# EAGLE board v5 (EAGLE 9.5.2), part 1 of 2
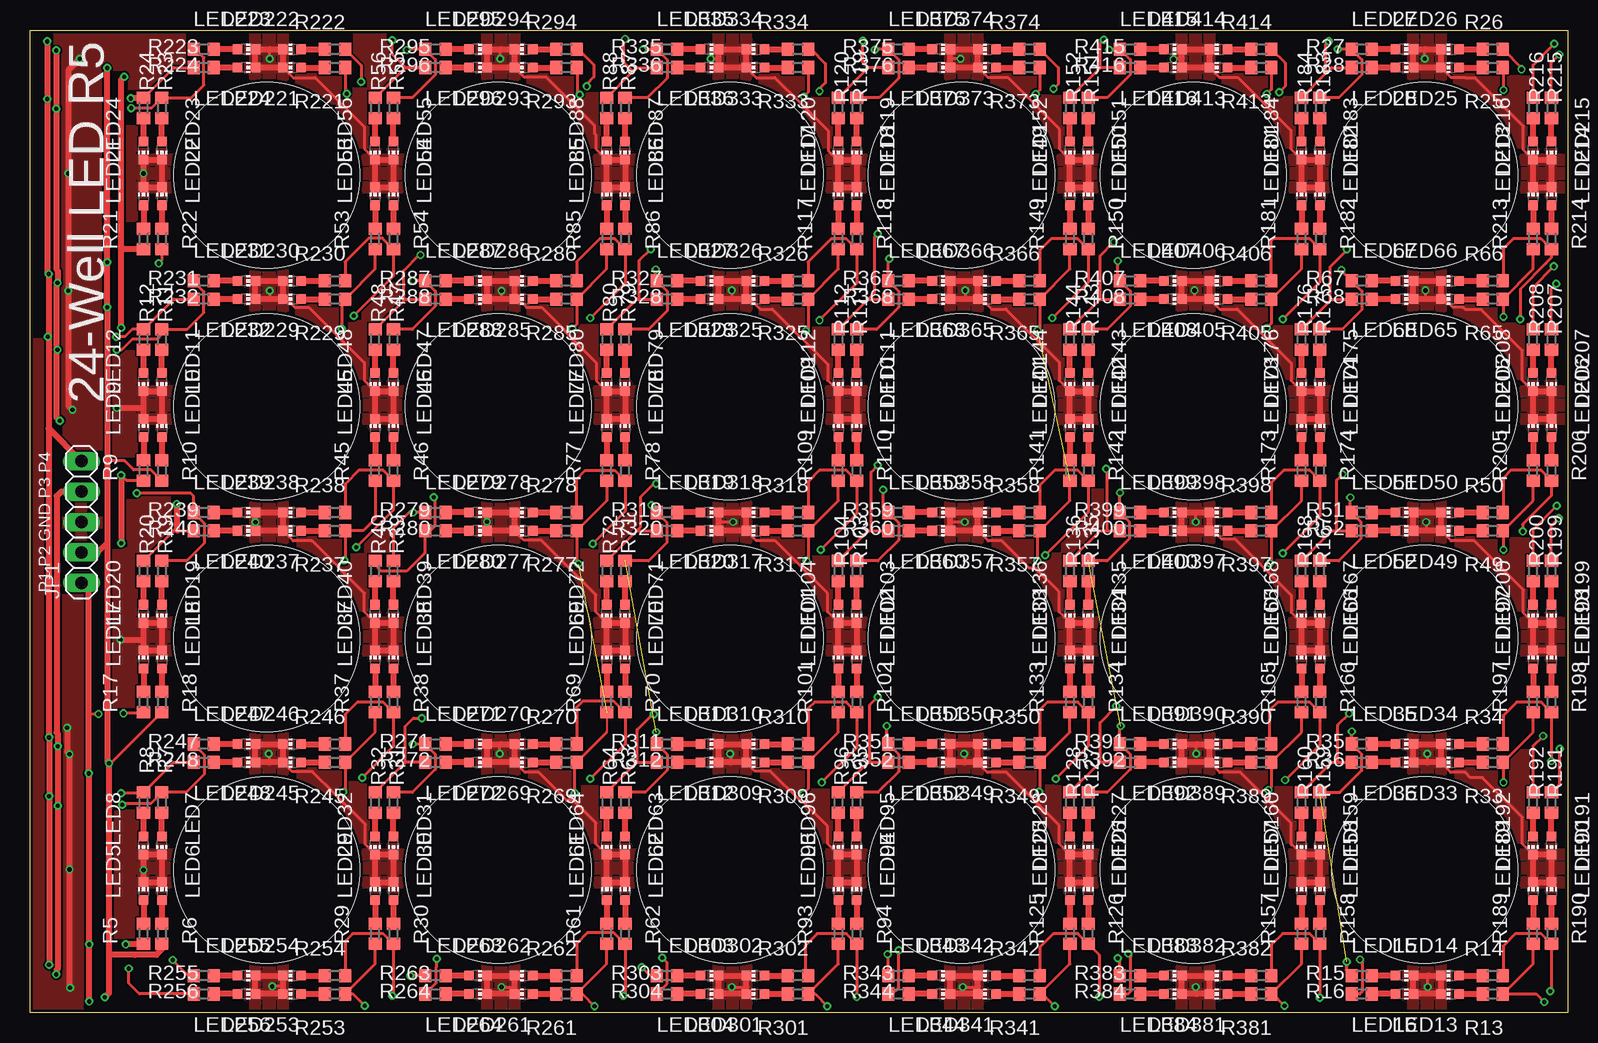
[diagram p0: board, top side]
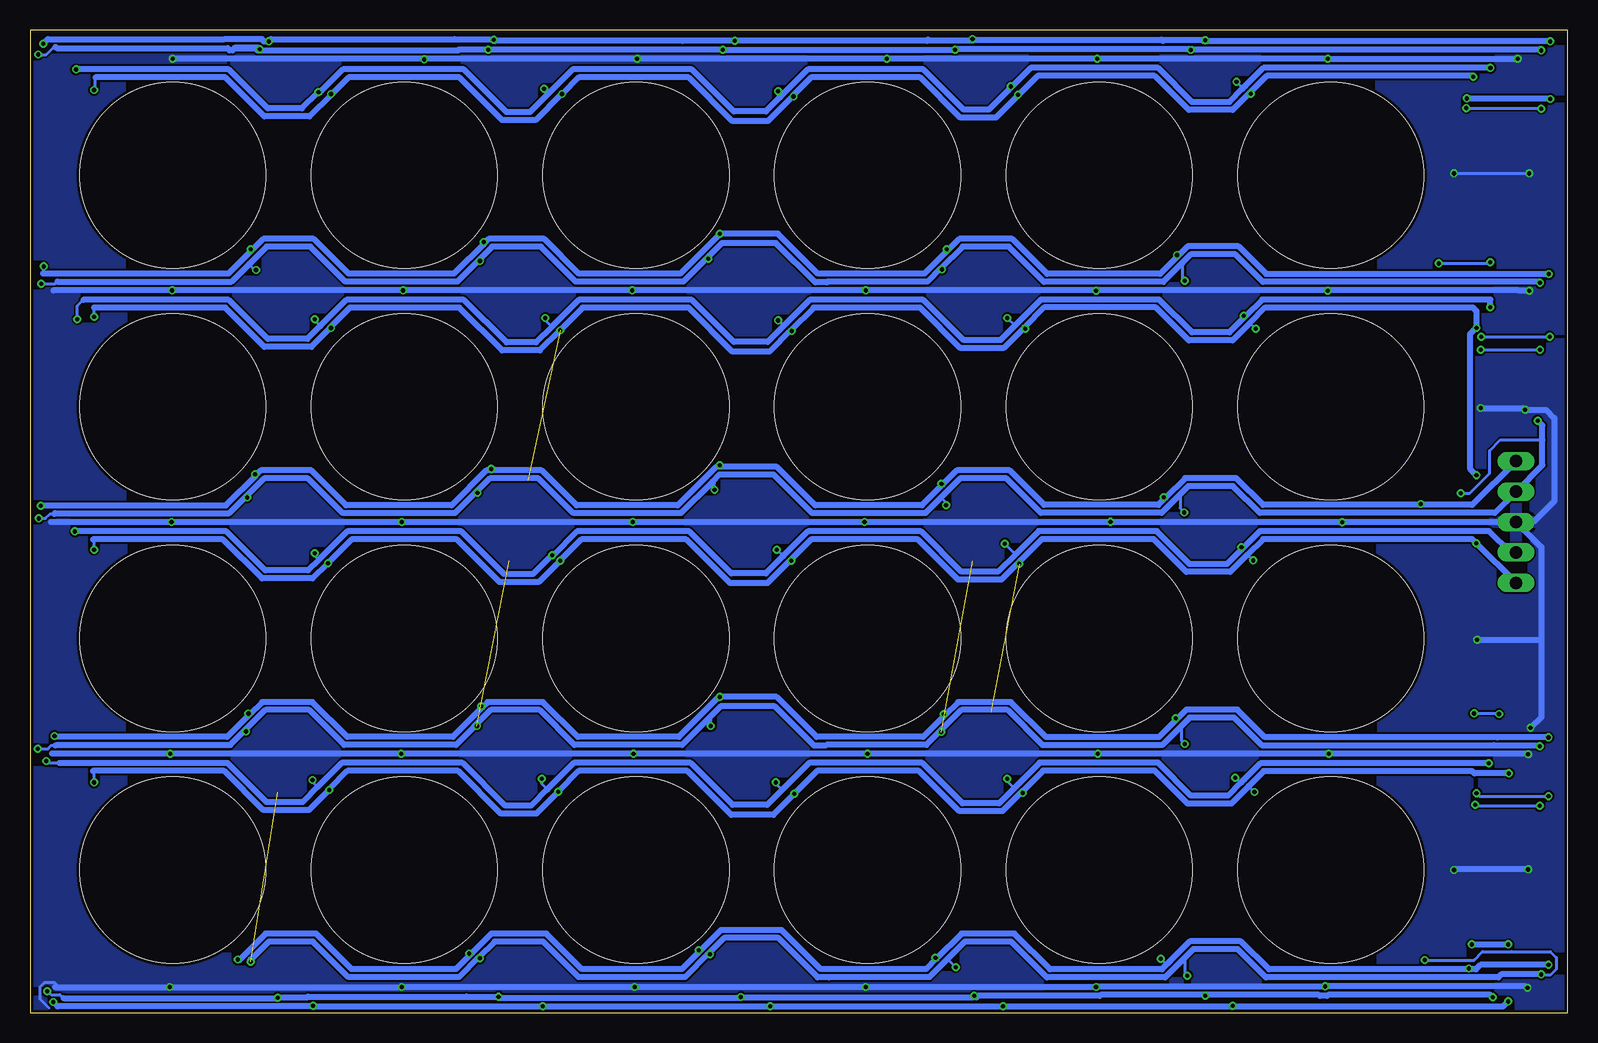
[diagram p1: board, bottom side, seen from below]

Size 128.13 x 81.9 mm. Coordinates in mm from the lower left corner, seen from the top.
Outline: 0,0 0,81.9 128.13,81.9 128.13,0 0,0
Copper layers (1*16): Top 0.035mm / dielectric 1.5mm / Bottom 0.035mm
Design rules "default *": minimum track width 7mil, minimum drill 0.35mm, track to track 6mil, track to pad 6mil, pad to pad 6mil, via to via 6mil, smd to smd 6mil, copper to edge 10mil, drill to drill 6mil, minimum pad ring 10mil, minimum via ring 6mil, stop-mask expansion 4mil, vias tented up to drill 0mil, thermal gap 10mil
Holes 15.5 mm at 19.73,31.2 19.73,50.5 19.73,69.8 39.03,31.2 39.03,50.5 39.03,69.8 58.33,31.2 58.33,50.5 58.33,69.8 77.63,31.2 77.63,50.5 77.63,69.8 96.93,31.2 96.93,50.5 96.93,69.8 116.23,69.8 116.23,50.5 116.23,31.2 19.73,11.9 39.03,11.9 58.33,11.9 77.63,11.9 96.93,11.9 116.23,11.9

## Footprints (pad centres in the part's own frame; a part is rotated, then mirrored left to right if it is on the bottom)
1X05 = drill 1.016 long: 1 -5.08,0; 2 -2.54,0; 3 0,0; 4 2.54,0; 5 5.08,0
CHIP-LED0603 = smd 0.8 x 0.8: A 0,-0.75; C 0,0.75
R0603 = smd 1 x 1.1: 1 -0.85,0; 2 0.85,0

## Placement (x,y rotation side)
JP1  [1X05]  4.29,40.9 90 top
LED5  [CHIP-LED0603]  9.46,10.15 0 top
LED6  [CHIP-LED0603]  10.99,10.15 0 top
LED7  [CHIP-LED0603]  10.99,13.96 180 top
LED8  [CHIP-LED0603]  9.46,13.96 180 top
LED9  [CHIP-LED0603]  9.46,48.75 0 top
LED10  [CHIP-LED0603]  10.99,48.75 0 top
LED11  [CHIP-LED0603]  10.99,52.56 180 top
LED12  [CHIP-LED0603]  9.46,52.56 180 top
LED13  [CHIP-LED0603]  118.34,1.57 90 top
LED14  [CHIP-LED0603]  118.34,3.1 90 top
LED15  [CHIP-LED0603]  114.53,3.1 270 top
LED16  [CHIP-LED0603]  114.53,1.57 270 top
LED17  [CHIP-LED0603]  9.46,29.45 0 top
LED18  [CHIP-LED0603]  10.99,29.45 0 top
LED19  [CHIP-LED0603]  10.99,33.26 180 top
LED20  [CHIP-LED0603]  9.46,33.26 180 top
LED21  [CHIP-LED0603]  9.46,68.05 0 top
LED22  [CHIP-LED0603]  10.99,68.05 0 top
LED23  [CHIP-LED0603]  10.99,71.86 180 top
LED24  [CHIP-LED0603]  9.46,71.86 180 top
LED25  [CHIP-LED0603]  118.34,78.77 90 top
LED26  [CHIP-LED0603]  118.34,80.3 90 top
LED27  [CHIP-LED0603]  114.53,80.3 270 top
LED28  [CHIP-LED0603]  114.53,78.77 270 top
LED29  [CHIP-LED0603]  28.76,10.15 0 top
LED30  [CHIP-LED0603]  30.29,10.15 0 top
LED31  [CHIP-LED0603]  30.29,13.96 180 top
LED32  [CHIP-LED0603]  28.76,13.96 180 top
LED33  [CHIP-LED0603]  118.34,20.87 90 top
LED34  [CHIP-LED0603]  118.34,22.4 90 top
LED35  [CHIP-LED0603]  114.53,22.4 270 top
LED36  [CHIP-LED0603]  114.53,20.87 270 top
LED37  [CHIP-LED0603]  28.76,29.45 0 top
LED38  [CHIP-LED0603]  30.29,29.45 0 top
LED39  [CHIP-LED0603]  30.29,33.26 180 top
LED40  [CHIP-LED0603]  28.76,33.26 180 top
LED45  [CHIP-LED0603]  28.76,48.75 0 top
LED46  [CHIP-LED0603]  30.29,48.75 0 top
LED47  [CHIP-LED0603]  30.29,52.56 180 top
LED48  [CHIP-LED0603]  28.76,52.56 180 top
LED49  [CHIP-LED0603]  118.34,40.17 90 top
LED50  [CHIP-LED0603]  118.34,41.7 90 top
LED51  [CHIP-LED0603]  114.53,41.7 270 top
LED52  [CHIP-LED0603]  114.53,40.17 270 top
LED53  [CHIP-LED0603]  28.76,68.05 0 top
LED54  [CHIP-LED0603]  30.29,68.05 0 top
LED55  [CHIP-LED0603]  30.29,71.86 180 top
LED56  [CHIP-LED0603]  28.76,71.86 180 top
LED61  [CHIP-LED0603]  48.06,10.15 0 top
LED62  [CHIP-LED0603]  49.59,10.15 0 top
LED63  [CHIP-LED0603]  49.59,13.96 180 top
LED64  [CHIP-LED0603]  48.06,13.96 180 top
LED65  [CHIP-LED0603]  118.34,59.47 90 top
LED66  [CHIP-LED0603]  118.34,61 90 top
LED67  [CHIP-LED0603]  114.53,61 270 top
LED68  [CHIP-LED0603]  114.53,59.47 270 top
LED69  [CHIP-LED0603]  48.06,29.45 0 top
LED70  [CHIP-LED0603]  49.59,29.45 0 top
LED71  [CHIP-LED0603]  49.59,33.26 180 top
LED72  [CHIP-LED0603]  48.06,33.26 180 top
LED77  [CHIP-LED0603]  48.06,48.75 0 top
LED78  [CHIP-LED0603]  49.59,48.75 0 top
LED79  [CHIP-LED0603]  49.59,52.56 180 top
LED80  [CHIP-LED0603]  48.06,52.56 180 top
LED85  [CHIP-LED0603]  48.06,68.05 0 top
LED86  [CHIP-LED0603]  49.59,68.05 0 top
LED87  [CHIP-LED0603]  49.59,71.86 180 top
LED88  [CHIP-LED0603]  48.06,71.86 180 top
LED93  [CHIP-LED0603]  67.36,10.15 0 top
LED94  [CHIP-LED0603]  68.89,10.15 0 top
LED95  [CHIP-LED0603]  68.89,13.96 180 top
LED96  [CHIP-LED0603]  67.36,13.96 180 top
LED101  [CHIP-LED0603]  67.36,29.45 0 top
LED102  [CHIP-LED0603]  68.89,29.45 0 top
LED103  [CHIP-LED0603]  68.89,33.26 180 top
LED104  [CHIP-LED0603]  67.36,33.26 180 top
LED109  [CHIP-LED0603]  67.36,48.75 0 top
LED110  [CHIP-LED0603]  68.89,48.75 0 top
LED111  [CHIP-LED0603]  68.89,52.56 180 top
LED112  [CHIP-LED0603]  67.36,52.56 180 top
LED117  [CHIP-LED0603]  67.36,68.05 0 top
LED118  [CHIP-LED0603]  68.89,68.05 0 top
LED119  [CHIP-LED0603]  68.89,71.86 180 top
LED120  [CHIP-LED0603]  67.36,71.86 180 top
LED125  [CHIP-LED0603]  86.66,10.15 0 top
LED126  [CHIP-LED0603]  88.19,10.15 0 top
LED127  [CHIP-LED0603]  88.19,13.96 180 top
LED128  [CHIP-LED0603]  86.66,13.96 180 top
LED133  [CHIP-LED0603]  86.66,29.45 0 top
LED134  [CHIP-LED0603]  88.19,29.45 0 top
LED135  [CHIP-LED0603]  88.19,33.26 180 top
LED136  [CHIP-LED0603]  86.66,33.26 180 top
LED141  [CHIP-LED0603]  86.66,48.75 0 top
LED142  [CHIP-LED0603]  88.19,48.75 0 top
LED143  [CHIP-LED0603]  88.19,52.56 180 top
LED144  [CHIP-LED0603]  86.66,52.56 180 top
LED149  [CHIP-LED0603]  86.66,68.05 0 top
LED150  [CHIP-LED0603]  88.19,68.05 0 top
LED151  [CHIP-LED0603]  88.19,71.86 180 top
LED152  [CHIP-LED0603]  86.66,71.86 180 top
LED157  [CHIP-LED0603]  105.96,10.15 0 top
LED158  [CHIP-LED0603]  107.49,10.15 0 top
LED159  [CHIP-LED0603]  107.49,13.96 180 top
LED160  [CHIP-LED0603]  105.96,13.96 180 top
LED165  [CHIP-LED0603]  105.96,29.45 0 top
LED166  [CHIP-LED0603]  107.49,29.45 0 top
LED167  [CHIP-LED0603]  107.49,33.26 180 top
LED168  [CHIP-LED0603]  105.96,33.26 180 top
LED173  [CHIP-LED0603]  105.96,48.75 0 top
LED174  [CHIP-LED0603]  107.49,48.75 0 top
LED175  [CHIP-LED0603]  107.49,52.56 180 top
LED176  [CHIP-LED0603]  105.96,52.56 180 top
LED181  [CHIP-LED0603]  105.96,68.05 0 top
LED182  [CHIP-LED0603]  107.49,68.05 0 top
LED183  [CHIP-LED0603]  107.49,71.86 180 top
LED184  [CHIP-LED0603]  105.96,71.86 180 top
LED189  [CHIP-LED0603]  125.26,10.15 0 top
LED190  [CHIP-LED0603]  126.79,10.15 0 top
LED191  [CHIP-LED0603]  126.79,13.96 180 top
LED192  [CHIP-LED0603]  125.26,13.96 180 top
LED197  [CHIP-LED0603]  125.26,29.45 0 top
LED198  [CHIP-LED0603]  126.79,29.45 0 top
LED199  [CHIP-LED0603]  126.79,33.26 180 top
LED200  [CHIP-LED0603]  125.26,33.26 180 top
LED205  [CHIP-LED0603]  125.26,48.75 0 top
LED206  [CHIP-LED0603]  126.79,48.75 0 top
LED207  [CHIP-LED0603]  126.79,52.56 180 top
LED208  [CHIP-LED0603]  125.26,52.56 180 top
LED213  [CHIP-LED0603]  125.26,68.05 0 top
LED214  [CHIP-LED0603]  126.79,68.05 0 top
LED215  [CHIP-LED0603]  126.79,71.86 180 top
LED216  [CHIP-LED0603]  125.26,71.86 180 top
LED221  [CHIP-LED0603]  21.84,78.77 90 top
LED222  [CHIP-LED0603]  21.84,80.3 90 top
LED223  [CHIP-LED0603]  18.03,80.3 270 top
LED224  [CHIP-LED0603]  18.03,78.77 270 top
LED229  [CHIP-LED0603]  21.84,59.47 90 top
LED230  [CHIP-LED0603]  21.84,61 90 top
LED231  [CHIP-LED0603]  18.03,61 270 top
LED232  [CHIP-LED0603]  18.03,59.47 270 top
LED237  [CHIP-LED0603]  21.84,40.17 90 top
LED238  [CHIP-LED0603]  21.84,41.7 90 top
LED239  [CHIP-LED0603]  18.03,41.7 270 top
LED240  [CHIP-LED0603]  18.03,40.17 270 top
LED245  [CHIP-LED0603]  21.84,20.87 90 top
LED246  [CHIP-LED0603]  21.84,22.4 90 top
LED247  [CHIP-LED0603]  18.03,22.4 270 top
LED248  [CHIP-LED0603]  18.03,20.87 270 top
LED253  [CHIP-LED0603]  21.84,1.57 90 top
LED254  [CHIP-LED0603]  21.84,3.1 90 top
LED255  [CHIP-LED0603]  18.03,3.1 270 top
LED256  [CHIP-LED0603]  18.03,1.57 270 top
LED261  [CHIP-LED0603]  41.14,1.57 90 top
LED262  [CHIP-LED0603]  41.14,3.1 90 top
LED263  [CHIP-LED0603]  37.33,3.1 270 top
LED264  [CHIP-LED0603]  37.33,1.57 270 top
LED269  [CHIP-LED0603]  41.14,20.87 90 top
LED270  [CHIP-LED0603]  41.14,22.4 90 top
LED271  [CHIP-LED0603]  37.33,22.4 270 top
LED272  [CHIP-LED0603]  37.33,20.87 270 top
LED277  [CHIP-LED0603]  41.14,40.17 90 top
LED278  [CHIP-LED0603]  41.14,41.7 90 top
LED279  [CHIP-LED0603]  37.33,41.7 270 top
LED280  [CHIP-LED0603]  37.33,40.17 270 top
LED285  [CHIP-LED0603]  41.14,59.47 90 top
LED286  [CHIP-LED0603]  41.14,61 90 top
LED287  [CHIP-LED0603]  37.33,61 270 top
LED288  [CHIP-LED0603]  37.33,59.47 270 top
LED293  [CHIP-LED0603]  41.14,78.77 90 top
LED294  [CHIP-LED0603]  41.14,80.3 90 top
LED295  [CHIP-LED0603]  37.33,80.3 270 top
LED296  [CHIP-LED0603]  37.33,78.77 270 top
LED301  [CHIP-LED0603]  60.44,1.57 90 top
LED302  [CHIP-LED0603]  60.44,3.1 90 top
LED303  [CHIP-LED0603]  56.63,3.1 270 top
LED304  [CHIP-LED0603]  56.63,1.57 270 top
LED309  [CHIP-LED0603]  60.44,20.87 90 top
LED310  [CHIP-LED0603]  60.44,22.4 90 top
LED311  [CHIP-LED0603]  56.63,22.4 270 top
LED312  [CHIP-LED0603]  56.63,20.87 270 top
LED317  [CHIP-LED0603]  60.44,40.17 90 top
LED318  [CHIP-LED0603]  60.44,41.7 90 top
LED319  [CHIP-LED0603]  56.63,41.7 270 top
LED320  [CHIP-LED0603]  56.63,40.17 270 top
LED325  [CHIP-LED0603]  60.44,59.47 90 top
LED326  [CHIP-LED0603]  60.44,61 90 top
LED327  [CHIP-LED0603]  56.63,61 270 top
LED328  [CHIP-LED0603]  56.63,59.47 270 top
LED333  [CHIP-LED0603]  60.44,78.77 90 top
LED334  [CHIP-LED0603]  60.44,80.3 90 top
LED335  [CHIP-LED0603]  56.63,80.3 270 top
LED336  [CHIP-LED0603]  56.63,78.77 270 top
LED341  [CHIP-LED0603]  79.74,1.57 90 top
LED342  [CHIP-LED0603]  79.74,3.1 90 top
LED343  [CHIP-LED0603]  75.93,3.1 270 top
LED344  [CHIP-LED0603]  75.93,1.57 270 top
LED349  [CHIP-LED0603]  79.74,20.87 90 top
LED350  [CHIP-LED0603]  79.74,22.4 90 top
LED351  [CHIP-LED0603]  75.93,22.4 270 top
LED352  [CHIP-LED0603]  75.93,20.87 270 top
LED357  [CHIP-LED0603]  79.74,40.17 90 top
LED358  [CHIP-LED0603]  79.74,41.7 90 top
LED359  [CHIP-LED0603]  75.93,41.7 270 top
LED360  [CHIP-LED0603]  75.93,40.17 270 top
LED365  [CHIP-LED0603]  79.74,59.47 90 top
LED366  [CHIP-LED0603]  79.74,61 90 top
LED367  [CHIP-LED0603]  75.93,61 270 top
LED368  [CHIP-LED0603]  75.93,59.47 270 top
LED373  [CHIP-LED0603]  79.74,78.77 90 top
LED374  [CHIP-LED0603]  79.74,80.3 90 top
LED375  [CHIP-LED0603]  75.93,80.3 270 top
LED376  [CHIP-LED0603]  75.93,78.77 270 top
LED381  [CHIP-LED0603]  99.04,1.57 90 top
LED382  [CHIP-LED0603]  99.04,3.1 90 top
LED383  [CHIP-LED0603]  95.23,3.1 270 top
LED384  [CHIP-LED0603]  95.23,1.57 270 top
LED389  [CHIP-LED0603]  99.04,20.87 90 top
LED390  [CHIP-LED0603]  99.04,22.4 90 top
LED391  [CHIP-LED0603]  95.23,22.4 270 top
LED392  [CHIP-LED0603]  95.23,20.87 270 top
LED397  [CHIP-LED0603]  99.04,40.17 90 top
LED398  [CHIP-LED0603]  99.04,41.7 90 top
LED399  [CHIP-LED0603]  95.23,41.7 270 top
LED400  [CHIP-LED0603]  95.23,40.17 270 top
LED405  [CHIP-LED0603]  99.04,59.47 90 top
LED406  [CHIP-LED0603]  99.04,61 90 top
LED407  [CHIP-LED0603]  95.23,61 270 top
LED408  [CHIP-LED0603]  95.23,59.47 270 top
LED413  [CHIP-LED0603]  99.04,78.77 90 top
LED414  [CHIP-LED0603]  99.04,80.3 90 top
LED415  [CHIP-LED0603]  95.23,80.3 270 top
LED416  [CHIP-LED0603]  95.23,78.77 270 top
R5  [R0603]  9.46,6.59 90 top
R6  [R0603]  10.99,6.59 90 top
R7  [R0603]  10.99,17.51 270 top
R8  [R0603]  9.46,17.51 270 top
R9  [R0603]  9.46,45.19 90 top
R10  [R0603]  10.99,45.19 90 top
R11  [R0603]  10.99,56.11 270 top
R12  [R0603]  9.46,56.11 270 top
R13  [R0603]  121.9,1.57 180 top
R14  [R0603]  121.9,3.1 180 top
R15  [R0603]  110.98,3.1 0 top
R16  [R0603]  110.98,1.57 0 top
R17  [R0603]  9.46,25.89 90 top
R18  [R0603]  10.99,25.89 90 top
R19  [R0603]  10.99,36.81 270 top
R20  [R0603]  9.46,36.81 270 top
R21  [R0603]  9.46,64.49 90 top
R22  [R0603]  10.99,64.49 90 top
R23  [R0603]  10.99,75.41 270 top
R24  [R0603]  9.46,75.41 270 top
R25  [R0603]  121.9,78.77 180 top
R26  [R0603]  121.9,80.3 180 top
R27  [R0603]  110.98,80.3 0 top
R28  [R0603]  110.98,78.77 0 top
R29  [R0603]  28.76,6.59 90 top
R30  [R0603]  30.29,6.59 90 top
R31  [R0603]  30.29,17.51 270 top
R32  [R0603]  28.76,17.51 270 top
R33  [R0603]  121.9,20.87 180 top
R34  [R0603]  121.9,22.4 180 top
R35  [R0603]  110.98,22.4 0 top
R36  [R0603]  110.98,20.87 0 top
R37  [R0603]  28.76,25.89 90 top
R38  [R0603]  30.29,25.89 90 top
R39  [R0603]  30.29,36.81 270 top
R40  [R0603]  28.76,36.81 270 top
R45  [R0603]  28.76,45.19 90 top
R46  [R0603]  30.29,45.19 90 top
R47  [R0603]  30.29,56.11 270 top
R48  [R0603]  28.76,56.11 270 top
R49  [R0603]  121.9,40.17 180 top
R50  [R0603]  121.9,41.7 180 top
R51  [R0603]  110.98,41.7 0 top
R52  [R0603]  110.98,40.17 0 top
R53  [R0603]  28.76,64.49 90 top
R54  [R0603]  30.29,64.49 90 top
R55  [R0603]  30.29,75.41 270 top
R56  [R0603]  28.76,75.41 270 top
R61  [R0603]  48.06,6.59 90 top
R62  [R0603]  49.59,6.59 90 top
R63  [R0603]  49.59,17.51 270 top
R64  [R0603]  48.06,17.51 270 top
R65  [R0603]  121.9,59.47 180 top
R66  [R0603]  121.9,61 180 top
R67  [R0603]  110.98,61 0 top
R68  [R0603]  110.98,59.47 0 top
R69  [R0603]  48.06,25.89 90 top
R70  [R0603]  49.59,25.89 90 top
R71  [R0603]  49.59,36.81 270 top
R72  [R0603]  48.06,36.81 270 top
R77  [R0603]  48.06,45.19 90 top
R78  [R0603]  49.59,45.19 90 top
R79  [R0603]  49.59,56.11 270 top
R80  [R0603]  48.06,56.11 270 top
R85  [R0603]  48.06,64.49 90 top
R86  [R0603]  49.59,64.49 90 top
R87  [R0603]  49.59,75.41 270 top
R88  [R0603]  48.06,75.41 270 top
R93  [R0603]  67.36,6.59 90 top
R94  [R0603]  68.89,6.59 90 top
R95  [R0603]  68.89,17.51 270 top
R96  [R0603]  67.36,17.51 270 top
R101  [R0603]  67.36,25.89 90 top
R102  [R0603]  68.89,25.89 90 top
R103  [R0603]  68.89,36.81 270 top
R104  [R0603]  67.36,36.81 270 top
R109  [R0603]  67.36,45.19 90 top
R110  [R0603]  68.89,45.19 90 top
R111  [R0603]  68.89,56.11 270 top
R112  [R0603]  67.36,56.11 270 top
R117  [R0603]  67.36,64.49 90 top
R118  [R0603]  68.89,64.49 90 top
R119  [R0603]  68.89,75.41 270 top
R120  [R0603]  67.36,75.41 270 top
R125  [R0603]  86.66,6.59 90 top
R126  [R0603]  88.19,6.59 90 top
R127  [R0603]  88.19,17.51 270 top
R128  [R0603]  86.66,17.51 270 top
R133  [R0603]  86.66,25.89 90 top
R134  [R0603]  88.19,25.89 90 top
R135  [R0603]  88.19,36.81 270 top
R136  [R0603]  86.66,36.81 270 top
R141  [R0603]  86.66,45.19 90 top
R142  [R0603]  88.19,45.19 90 top
R143  [R0603]  88.19,56.11 270 top
R144  [R0603]  86.66,56.11 270 top
R149  [R0603]  86.66,64.49 90 top
R150  [R0603]  88.19,64.49 90 top
R151  [R0603]  88.19,75.41 270 top
R152  [R0603]  86.66,75.41 270 top
R157  [R0603]  105.96,6.59 90 top
R158  [R0603]  107.49,6.59 90 top
R159  [R0603]  107.49,17.51 270 top
R160  [R0603]  105.96,17.51 270 top
R165  [R0603]  105.96,25.89 90 top
R166  [R0603]  107.49,25.89 90 top
R167  [R0603]  107.49,36.81 270 top
R168  [R0603]  105.96,36.81 270 top
R173  [R0603]  105.96,45.19 90 top
R174  [R0603]  107.49,45.19 90 top
R175  [R0603]  107.49,56.11 270 top
R176  [R0603]  105.96,56.11 270 top
R181  [R0603]  105.96,64.49 90 top
R182  [R0603]  107.49,64.49 90 top
R183  [R0603]  107.49,75.41 270 top
R184  [R0603]  105.96,75.41 270 top
R189  [R0603]  125.26,6.59 90 top
R190  [R0603]  126.79,6.59 90 top
R191  [R0603]  126.79,17.51 270 top
R192  [R0603]  125.26,17.51 270 top
R197  [R0603]  125.26,25.89 90 top
R198  [R0603]  126.79,25.89 90 top
R199  [R0603]  126.79,36.81 270 top
R200  [R0603]  125.26,36.81 270 top
R205  [R0603]  125.26,45.19 90 top
R206  [R0603]  126.79,45.19 90 top
R207  [R0603]  126.79,56.11 270 top
R208  [R0603]  125.26,56.11 270 top
R213  [R0603]  125.26,64.49 90 top
R214  [R0603]  126.79,64.49 90 top
R215  [R0603]  126.79,75.41 270 top
R216  [R0603]  125.26,75.41 270 top
R221  [R0603]  25.4,78.77 180 top
R222  [R0603]  25.4,80.3 180 top
R223  [R0603]  14.48,80.3 0 top
R224  [R0603]  14.48,78.77 0 top
R229  [R0603]  25.4,59.47 180 top
R230  [R0603]  25.4,61 180 top
R231  [R0603]  14.48,61 0 top
R232  [R0603]  14.48,59.47 0 top
R237  [R0603]  25.4,40.17 180 top
R238  [R0603]  25.4,41.7 180 top
R239  [R0603]  14.48,41.7 0 top
R240  [R0603]  14.48,40.17 0 top
R245  [R0603]  25.4,20.87 180 top
R246  [R0603]  25.4,22.4 180 top
R247  [R0603]  14.48,22.4 0 top
R248  [R0603]  14.48,20.87 0 top
R253  [R0603]  25.4,1.57 180 top
R254  [R0603]  25.4,3.1 180 top
R255  [R0603]  14.48,3.1 0 top
R256  [R0603]  14.48,1.57 0 top
R261  [R0603]  44.7,1.57 180 top
R262  [R0603]  44.7,3.1 180 top
R263  [R0603]  33.78,3.1 0 top
R264  [R0603]  33.78,1.57 0 top
R269  [R0603]  44.7,20.87 180 top
R270  [R0603]  44.7,22.4 180 top
R271  [R0603]  33.78,22.4 0 top
R272  [R0603]  33.78,20.87 0 top
R277  [R0603]  44.7,40.17 180 top
R278  [R0603]  44.7,41.7 180 top
R279  [R0603]  33.78,41.7 0 top
R280  [R0603]  33.78,40.17 0 top
R285  [R0603]  44.7,59.47 180 top
R286  [R0603]  44.7,61 180 top
R287  [R0603]  33.78,61 0 top
R288  [R0603]  33.78,59.47 0 top
R293  [R0603]  44.7,78.77 180 top
R294  [R0603]  44.7,80.3 180 top
R295  [R0603]  33.78,80.3 0 top
R296  [R0603]  33.78,78.77 0 top
R301  [R0603]  64,1.57 180 top
R302  [R0603]  64,3.1 180 top
R303  [R0603]  53.08,3.1 0 top
R304  [R0603]  53.08,1.57 0 top
R309  [R0603]  64,20.87 180 top
R310  [R0603]  64,22.4 180 top
R311  [R0603]  53.08,22.4 0 top
R312  [R0603]  53.08,20.87 0 top
R317  [R0603]  64,40.17 180 top
R318  [R0603]  64,41.7 180 top
R319  [R0603]  53.08,41.7 0 top
R320  [R0603]  53.08,40.17 0 top
R325  [R0603]  64,59.47 180 top
R326  [R0603]  64,61 180 top
R327  [R0603]  53.08,61 0 top
R328  [R0603]  53.08,59.47 0 top
R333  [R0603]  64,78.77 180 top
R334  [R0603]  64,80.3 180 top
R335  [R0603]  53.08,80.3 0 top
R336  [R0603]  53.08,78.77 0 top
R341  [R0603]  83.3,1.57 180 top
R342  [R0603]  83.3,3.1 180 top
R343  [R0603]  72.38,3.1 0 top
R344  [R0603]  72.38,1.57 0 top
R349  [R0603]  83.3,20.87 180 top
R350  [R0603]  83.3,22.4 180 top
R351  [R0603]  72.38,22.4 0 top
R352  [R0603]  72.38,20.87 0 top
R357  [R0603]  83.3,40.17 180 top
R358  [R0603]  83.3,41.7 180 top
R359  [R0603]  72.38,41.7 0 top
R360  [R0603]  72.38,40.17 0 top
R365  [R0603]  83.3,59.47 180 top
R366  [R0603]  83.3,61 180 top
R367  [R0603]  72.38,61 0 top
R368  [R0603]  72.38,59.47 0 top
R373  [R0603]  83.3,78.77 180 top
R374  [R0603]  83.3,80.3 180 top
R375  [R0603]  72.38,80.3 0 top
R376  [R0603]  72.38,78.77 0 top
R381  [R0603]  102.6,1.57 180 top
R382  [R0603]  102.6,3.1 180 top
R383  [R0603]  91.68,3.1 0 top
R384  [R0603]  91.68,1.57 0 top
R389  [R0603]  102.6,20.87 180 top
R390  [R0603]  102.6,22.4 180 top
R391  [R0603]  91.68,22.4 0 top
R392  [R0603]  91.68,20.87 0 top
R397  [R0603]  102.6,40.17 180 top
R398  [R0603]  102.6,41.7 180 top
R399  [R0603]  91.68,41.7 0 top
R400  [R0603]  91.68,40.17 0 top
R405  [R0603]  102.6,59.47 180 top
R406  [R0603]  102.6,61 180 top
R407  [R0603]  91.68,61 0 top
R408  [R0603]  91.68,59.47 0 top
R413  [R0603]  102.6,78.77 180 top
R414  [R0603]  102.6,80.3 180 top
R415  [R0603]  91.68,80.3 0 top
R416  [R0603]  91.68,78.77 0 top

## Library data of the parts
JP1 = pinhead
LED5-LED40 LED45-LED56 LED61-LED72 LED77-LED80 LED85-LED88 LED93-LED96 LED101-LED104 LED109-LED112 LED117-LED120 LED125-LED128 LED133-LED136 LED141-LED144 LED149-LED152 LED157-LED160 LED165-LED168 LED173-LED176 LED181-LED184 LED189-LED192 LED197-LED200 LED205-LED208 LED213-LED216 LED221-LED224 LED229-LED232 LED237-LED240 LED245-LED248 LED253-LED256 LED261-LED264 LED269-LED272 LED277-LED280 LED285-LED288 LED293-LED296 LED301-LED304 LED309-LED312 LED317-LED320 LED325-LED328 LED333-LED336 LED341-LED344 LED349-LED352 LED357-LED360 LED365-LED368 LED373-LED376 LED381-LED384 LED389-LED392 LED397-LED400 LED405-LED408 LED413-LED416 = led
R5-R40 R45-R56 R61-R72 R77-R80 R85-R88 R93-R96 R101-R104 R109-R112 R117-R120 R125-R128 R133-R136 R141-R144 R149-R152 R157-R160 R165-R168 R173-R176 R181-R184 R189-R192 R197-R200 R205-R208 R213-R216 R221-R224 R229-R232 R237-R240 R245-R248 R253-R256 R261-R264 R269-R272 R277-R280 R285-R288 R293-R296 R301-R304 R309-R312 R317-R320 R325-R328 R333-R336 R341-R344 R349-R352 R357-R360 R365-R368 R373-R376 R381-R384 R389-R392 R397-R400 R405-R408 R413-R416 = adafruit

## Nets
GND: JP1.3 LED5.C LED6.C LED7.C LED8.C LED9.C LED10.C LED11.C LED12.C LED13.C LED14.C LED15.C LED16.C LED17.C LED18.C LED19.C LED20.C LED21.C LED22.C LED23.C LED24.C LED25.C LED26.C LED27.C LED28.C LED29.C LED30.C LED31.C LED32.C LED33.C LED34.C LED35.C LED36.C LED37.C LED38.C LED39.C LED40.C LED45.C LED46.C LED47.C LED48.C LED49.C LED50.C LED51.C LED52.C LED53.C LED54.C LED55.C LED56.C LED61.C LED62.C LED63.C LED64.C LED65.C LED66.C LED67.C LED68.C LED69.C LED70.C LED71.C LED72.C LED77.C LED78.C LED79.C LED80.C LED85.C LED86.C LED87.C LED88.C LED93.C LED94.C LED95.C LED96.C LED101.C LED102.C LED103.C LED104.C LED109.C LED110.C LED111.C LED112.C LED117.C LED118.C LED119.C LED120.C LED125.C LED126.C LED127.C LED128.C LED133.C LED134.C LED135.C LED136.C LED141.C LED142.C LED143.C LED144.C LED149.C LED150.C LED151.C LED152.C LED157.C LED158.C LED159.C LED160.C LED165.C LED166.C LED167.C LED168.C LED173.C LED174.C LED175.C LED176.C LED181.C LED182.C LED183.C LED184.C LED189.C LED190.C LED191.C LED192.C LED197.C LED198.C LED199.C LED200.C LED205.C LED206.C LED207.C LED208.C LED213.C LED214.C LED215.C LED216.C LED221.C LED222.C LED223.C LED224.C LED229.C LED230.C LED231.C LED232.C LED237.C LED238.C LED239.C LED240.C LED245.C LED246.C LED247.C LED248.C LED253.C LED254.C LED255.C LED256.C LED261.C LED262.C LED263.C LED264.C LED269.C LED270.C LED271.C LED272.C LED277.C LED278.C LED279.C LED280.C LED285.C LED286.C LED287.C LED288.C LED293.C LED294.C LED295.C LED296.C LED301.C LED302.C LED303.C LED304.C LED309.C LED310.C LED311.C LED312.C LED317.C LED318.C LED319.C LED320.C LED325.C LED326.C LED327.C LED328.C LED333.C LED334.C LED335.C LED336.C LED341.C LED342.C LED343.C LED344.C LED349.C LED350.C LED351.C LED352.C LED357.C LED358.C LED359.C LED360.C LED365.C LED366.C LED367.C LED368.C LED373.C LED374.C LED375.C LED376.C LED381.C LED382.C LED383.C LED384.C LED389.C LED390.C LED391.C LED392.C LED397.C LED398.C LED399.C LED400.C LED405.C LED406.C LED407.C LED408.C LED413.C LED414.C LED415.C LED416.C
N$1: LED5.A R5.2
N$2: LED6.A R6.2
N$3: LED7.A R7.2
N$4: LED8.A R8.2
N$5: LED9.A R9.2
N$6: LED10.A R10.2
N$7: LED11.A R11.2
N$8: LED12.A R12.2
N$9: LED13.A R13.2
N$10: LED14.A R14.2
N$11: LED15.A R15.2
N$12: LED16.A R16.2
N$13: LED17.A R17.2
N$14: LED18.A R18.2
N$15: LED19.A R19.2
N$16: LED20.A R20.2
N$17: LED21.A R21.2
N$18: LED22.A R22.2
N$19: LED23.A R23.2
N$20: LED24.A R24.2
N$21: LED25.A R25.2
N$22: LED26.A R26.2
N$23: LED27.A R27.2
N$24: LED28.A R28.2
N$29: LED29.A R29.2
N$30: LED30.A R30.2
N$31: LED31.A R31.2
N$32: LED32.A R32.2
N$33: LED33.A R33.2
N$34: LED34.A R34.2
N$35: LED35.A R35.2
N$36: LED36.A R36.2
N$37: LED37.A R37.2
N$38: LED38.A R38.2
N$39: LED39.A R39.2
N$40: LED40.A R40.2
N$45: LED45.A R45.2
N$46: LED46.A R46.2
N$47: LED47.A R47.2
N$48: LED48.A R48.2
N$49: LED49.A R49.2
N$50: LED50.A R50.2
N$51: LED51.A R51.2
N$52: LED52.A R52.2
N$53: LED53.A R53.2
N$54: LED54.A R54.2
N$55: LED55.A R55.2
N$56: LED56.A R56.2
N$61: LED61.A R61.2
N$62: LED62.A R62.2
N$63: LED63.A R63.2
N$64: LED64.A R64.2
N$65: LED65.A R65.2
N$66: LED66.A R66.2
N$67: LED67.A R67.2
N$68: LED68.A R68.2
N$69: LED69.A R69.2
N$70: LED70.A R70.2
N$71: LED71.A R71.2
N$72: LED72.A R72.2
N$77: LED77.A R77.2
N$78: LED78.A R78.2
N$79: LED79.A R79.2
N$80: LED80.A R80.2
N$85: LED85.A R85.2
N$86: LED86.A R86.2
N$87: LED87.A R87.2
N$88: LED88.A R88.2
N$93: LED93.A R93.2
N$94: LED94.A R94.2
N$95: LED95.A R95.2
N$96: LED96.A R96.2
N$101: LED101.A R101.2
N$102: LED102.A R102.2
N$103: LED103.A R103.2
N$104: LED104.A R104.2
N$109: LED109.A R109.2
N$110: LED110.A R110.2
N$111: LED111.A R111.2
N$112: LED112.A R112.2
N$117: LED117.A R117.2
N$118: LED118.A R118.2
N$119: LED119.A R119.2
N$120: LED120.A R120.2
N$125: LED125.A R125.2
N$126: LED126.A R126.2
N$127: LED127.A R127.2
N$128: LED128.A R128.2
N$133: LED133.A R133.2
N$134: LED134.A R134.2
N$135: LED135.A R135.2
N$136: LED136.A R136.2
N$141: LED141.A R141.2
N$142: LED142.A R142.2
N$143: LED143.A R143.2
N$144: LED144.A R144.2
N$149: LED149.A R149.2
N$150: LED150.A R150.2
N$151: LED151.A R151.2
N$152: LED152.A R152.2
N$157: LED157.A R157.2
N$158: LED158.A R158.2
N$159: LED159.A R159.2
N$160: LED160.A R160.2
N$165: LED165.A R165.2
N$166: LED166.A R166.2
N$167: LED167.A R167.2
N$168: LED168.A R168.2
N$173: LED173.A R173.2
N$174: LED174.A R174.2
N$175: LED175.A R175.2
N$176: LED176.A R176.2
N$181: LED181.A R181.2
N$182: LED182.A R182.2
N$183: LED183.A R183.2
N$184: LED184.A R184.2
N$189: LED189.A R189.2
N$190: LED190.A R190.2
N$191: LED191.A R191.2
N$192: LED192.A R192.2
N$197: LED197.A R197.2
N$198: LED198.A R198.2
N$199: LED199.A R199.2
N$200: LED200.A R200.2
N$205: LED205.A R205.2
N$206: LED206.A R206.2
N$207: LED207.A R207.2
N$208: LED208.A R208.2
N$213: LED213.A R213.2
N$214: LED214.A R214.2
N$215: LED215.A R215.2
N$216: LED216.A R216.2
N$221: LED221.A R221.2
N$222: LED222.A R222.2
N$223: LED223.A R223.2
N$224: LED224.A R224.2
N$229: LED229.A R229.2
N$230: LED230.A R230.2
N$231: LED231.A R231.2
N$232: LED232.A R232.2
N$237: LED237.A R237.2
N$238: LED238.A R238.2
N$239: LED239.A R239.2
N$240: LED240.A R240.2
N$245: LED245.A R245.2
N$246: LED246.A R246.2
N$247: LED247.A R247.2
N$248: LED248.A R248.2
N$253: LED253.A R253.2
N$254: LED254.A R254.2
N$255: LED255.A R255.2
N$256: LED256.A R256.2
N$261: LED261.A R261.2
N$262: LED262.A R262.2
N$263: LED263.A R263.2
N$264: LED264.A R264.2
N$269: LED269.A R269.2
N$270: LED270.A R270.2
N$271: LED271.A R271.2
N$272: LED272.A R272.2
N$277: LED277.A R277.2
N$278: LED278.A R278.2
N$279: LED279.A R279.2
N$280: LED280.A R280.2
N$285: LED285.A R285.2
N$286: LED286.A R286.2
N$287: LED287.A R287.2
N$288: LED288.A R288.2
N$293: LED293.A R293.2
N$294: LED294.A R294.2
N$295: LED295.A R295.2
N$296: LED296.A R296.2
N$301: LED301.A R301.2
N$302: LED302.A R302.2
N$303: LED303.A R303.2
N$304: LED304.A R304.2
N$309: LED309.A R309.2
N$310: LED310.A R310.2
N$311: LED311.A R311.2
N$312: LED312.A R312.2
N$317: LED317.A R317.2
N$318: LED318.A R318.2
N$319: LED319.A R319.2
N$320: LED320.A R320.2
N$325: LED325.A R325.2
N$326: LED326.A R326.2
N$327: LED327.A R327.2
N$328: LED328.A R328.2
N$333: LED333.A R333.2
N$334: LED334.A R334.2
N$335: LED335.A R335.2
N$336: LED336.A R336.2
N$341: LED341.A R341.2
N$342: LED342.A R342.2
N$343: LED343.A R343.2
N$344: LED344.A R344.2
N$349: LED349.A R349.2
N$350: LED350.A R350.2
N$351: LED351.A R351.2
N$352: LED352.A R352.2
N$357: LED357.A R357.2
N$358: LED358.A R358.2
N$359: LED359.A R359.2
N$360: LED360.A R360.2
N$365: LED365.A R365.2
N$366: LED366.A R366.2
N$367: LED367.A R367.2
N$368: LED368.A R368.2
N$373: LED373.A R373.2
N$374: LED374.A R374.2
N$375: LED375.A R375.2
N$376: LED376.A R376.2
N$381: LED381.A R381.2
N$382: LED382.A R382.2
N$383: LED383.A R383.2
N$384: LED384.A R384.2
N$389: LED389.A R389.2
N$390: LED390.A R390.2
N$391: LED391.A R391.2
N$392: LED392.A R392.2
N$397: LED397.A R397.2
N$398: LED398.A R398.2
N$399: LED399.A R399.2
N$400: LED400.A R400.2
N$405: LED405.A R405.2
N$406: LED406.A R406.2
N$407: LED407.A R407.2
N$408: LED408.A R408.2
N$413: LED413.A R413.2
N$414: LED414.A R414.2
N$415: LED415.A R415.2
N$416: LED416.A R416.2
P1: JP1.1 R5.1 R9.1 R13.1 R17.1 R21.1 R25.1 R29.1 R33.1 R37.1 R45.1 R49.1 R53.1 R61.1 R65.1 R69.1 R77.1 R85.1 R93.1 R101.1 R109.1 R117.1 R125.1 R133.1 R141.1 R149.1 R157.1 R165.1 R173.1 R181.1 R189.1 R197.1 R205.1 R213.1 R221.1 R229.1 R237.1 R245.1 R253.1 R261.1 R269.1 R277.1 R285.1 R293.1 R301.1 R309.1 R317.1 R325.1 R333.1 R341.1 R349.1 R357.1 R365.1 R373.1 R381.1 R389.1 R397.1 R405.1 R413.1
P2: JP1.2 R6.1 R10.1 R14.1 R18.1 R22.1 R26.1 R30.1 R34.1 R38.1 R46.1 R50.1 R54.1 R62.1 R66.1 R70.1 R78.1 R86.1 R94.1 R102.1 R110.1 R118.1 R126.1 R134.1 R142.1 R150.1 R158.1 R166.1 R174.1 R182.1 R190.1 R198.1 R206.1 R214.1 R222.1 R230.1 R238.1 R246.1 R254.1 R262.1 R270.1 R278.1 R286.1 R294.1 R302.1 R310.1 R318.1 R326.1 R334.1 R342.1 R350.1 R358.1 R366.1 R374.1 R382.1 R390.1 R398.1 R406.1 R414.1
P3: JP1.4 R7.1 R11.1 R15.1 R19.1 R23.1 R27.1 R31.1 R35.1 R39.1 R47.1 R51.1 R55.1 R63.1 R67.1 R71.1 R79.1 R87.1 R95.1 R103.1 R111.1 R119.1 R127.1 R135.1 R143.1 R151.1 R159.1 R167.1 R175.1 R183.1 R191.1 R199.1 R207.1 R215.1 R223.1 R231.1 R239.1 R247.1 R255.1 R263.1 R271.1 R279.1 R287.1 R295.1 R303.1 R311.1 R319.1 R327.1 R335.1 R343.1 R351.1 R359.1 R367.1 R375.1 R383.1 R391.1 R399.1 R407.1 R415.1
P4: JP1.5 R8.1 R12.1 R16.1 R20.1 R24.1 R28.1 R32.1 R36.1 R40.1 R48.1 R52.1 R56.1 R64.1 R68.1 R72.1 R80.1 R88.1 R96.1 R104.1 R112.1 R120.1 R128.1 R136.1 R144.1 R152.1 R160.1 R168.1 R176.1 R184.1 R192.1 R200.1 R208.1 R216.1 R224.1 R232.1 R240.1 R248.1 R256.1 R264.1 R272.1 R280.1 R288.1 R296.1 R304.1 R312.1 R320.1 R328.1 R336.1 R344.1 R352.1 R360.1 R368.1 R376.1 R384.1 R392.1 R400.1 R408.1 R416.1